# EAGLE board muses72320_D (EAGLE 7.2.0)
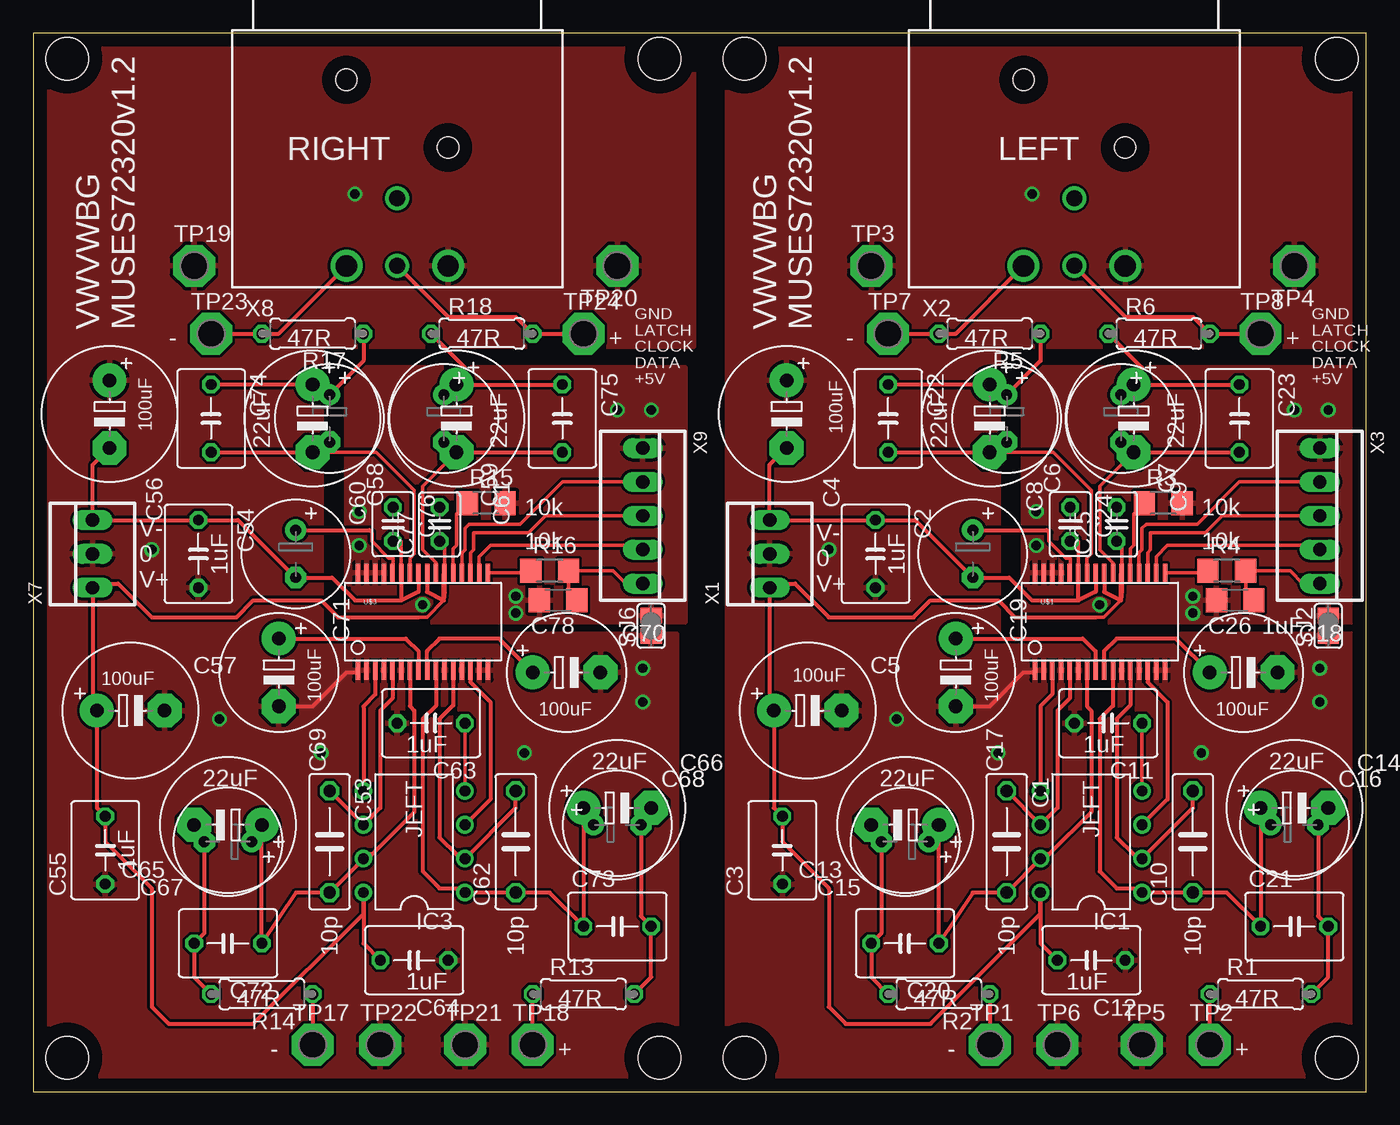
[diagram p0: board, top side]
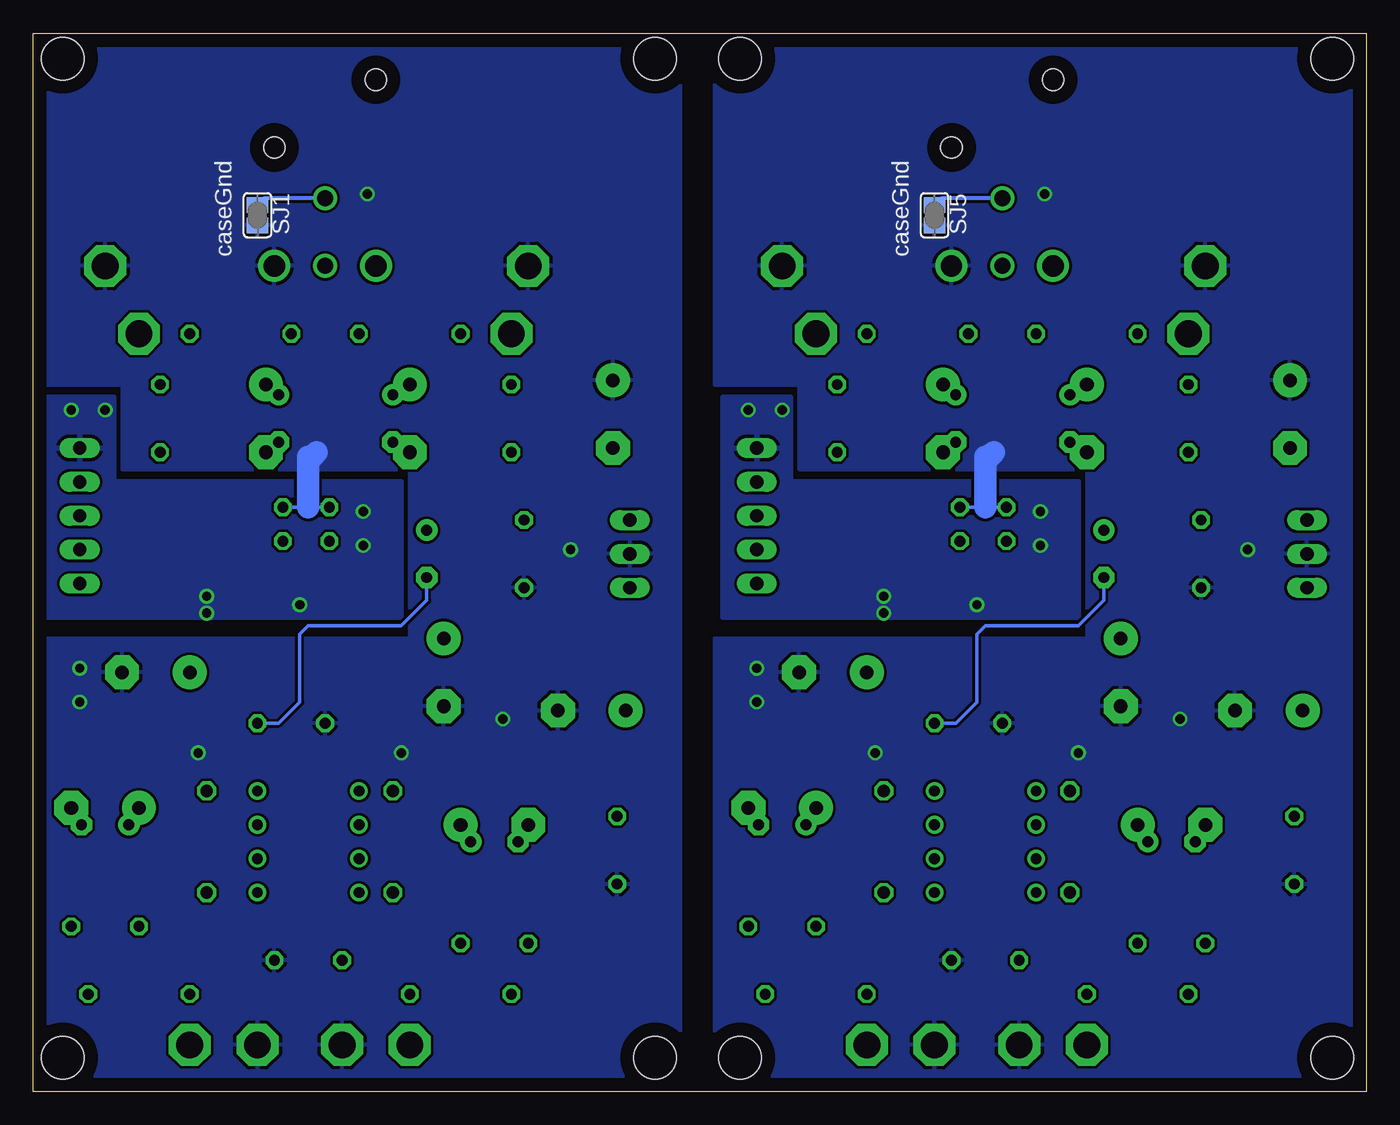
[diagram p1: board, bottom side, seen from below]

Size 100 x 79.36 mm. Coordinates in mm from the lower left corner, seen from the top.
Outline: 0,0 100,0 100,79.36 0,79.36 0,0
Copper layers (1*16): Top 0.035mm / dielectric 1.5mm / Bottom 0.035mm
Design rules "default": minimum track width 10mil, minimum drill 24mil, track to track 8mil, track to pad 8mil, pad to pad 8mil, via to via 8mil, smd to smd 8mil, copper to edge 40mil, drill to drill 8mil, minimum pad ring 10mil, minimum via ring 8mil, stop-mask expansion 4mil, vias tented up to drill 0mil, thermal gap 10mil
Holes 3.2 mm at 2.54,2.54 46.99,2.54 46.99,77.47 2.54,77.47 53.34,2.54 97.79,2.54 97.79,77.47 53.34,77.47

## Footprints (pad centres in the part's own frame; a part is rotated, then mirrored left to right if it is on the bottom)
C075-032X103 = drill 0.914 octagon: 1 -3.81,0; 2 3.81,0
C050-050X075 = drill 0.813 octagon: 1 -2.54,0; 2 2.54,0
E5-10,5 = drill 1.016 pad 2.54: + -2.54,0 | drill 1.016 pad 2.54 octagon: - 2.54,0
E3,5-8 = drill 0.813 pad 1.6: + -1.778,0 | drill 0.813 pad 1.6 octagon: - 1.778,0
E5-8,5 = drill 1.016 pad 2.54: + -2.54,0 | drill 1.016 pad 2.54 octagon: - 2.54,0
C025-030X050 = drill 0.813 octagon: 1 -1.27,0; 2 1.27,0
C1206 = smd 1.6 x 1.8: 1 -1.4,0; 2 1.4,0
DIL08 = drill 0.813 pad 1.27: 1 -3.81,-3.81; 2 -1.27,-3.81; 3 1.27,-3.81; 4 3.81,-3.81; 5 3.81,3.81; 6 1.27,3.81; 7 -1.27,3.81; 8 -3.81,3.81
0207/7 = drill 0.813 octagon: 1 -3.81,0; 2 3.81,0
R1206 = smd 1.6 x 1.803: 1 -1.422,0; 2 1.422,0
SJ = smd 1.168 x 1.6: 1 -0.762,0; 2 0.762,0
P1-20 = drill 2.007 pad 3.15 octagon: TP 0,0
SSOP28DB = smd 0.348 x 1.397: 1 -4.225,-3.656; 2 -3.575,-3.656; 3 -2.925,-3.656; 4 -2.275,-3.656; 5 -1.625,-3.656; 6 -0.975,-3.656; 7 -0.325,-3.656; 8 0.325,-3.656; 9 0.975,-3.656; 10 1.625,-3.656; 11 2.275,-3.656; 12 2.925,-3.656; 13 3.575,-3.656; 14 4.225,-3.656; 15 4.875,-3.656; 16 5.525,-3.656; 17 5.525,3.656; 18 4.875,3.656; 19 4.225,3.656; 20 3.575,3.656; 21 2.925,3.656; 22 2.275,3.656; 23 1.625,3.656; 24 0.975,3.656; 25 0.325,3.656; 26 -0.325,3.656; 27 -0.975,3.656; 28 -1.625,3.656; 29 -2.275,3.656; 30 -2.925,3.656; 31 -3.575,3.656; 32 -4.225,3.656
22-23-2031 = drill 1 long: 1 -2.54,0; 2 0,0; 3 2.54,0
NC3MBH-B = drill 1.6: 1 3.81,0; 2 -3.81,0 | drill 1.2: 3 0,0; G 0,5.08 | hole 1.6: -3.81,13.97; 3.81,8.89
22-23-2051 = drill 1 long: 1 -5.08,0; 2 -2.54,0; 3 0,0; 4 2.54,0; 5 5.08,0

## Placement (x,y rotation side)
C1  [C075-032X103]  73.03,18.73 270 top
C2  [C050-050X075]  63.18,40.32 270 top
C3  [C050-050X075]  56.2,18.1 90 top
C4  [E5-10,5]  56.52,50.8 270 top
C5  [E5-10,5]  58.1,28.57 0 top
C6  [E3,5-8]  73.03,50.48 270 top
C7  [E3,5-8]  81.6,50.48 270 top
C8  [E5-10,5]  71.75,50.48 270 top
C9  [E5-10,5]  82.55,50.48 270 top
C10  [C075-032X103]  87,18.73 90 top
C11  [C050-050X075]  80.64,27.62 180 top
C12  [C050-050X075]  79.38,9.84 180 top
C13  [E5-10,5]  65.41,20 180 top
C14  [E5-10,5]  94.61,21.27 0 top
C15  [E3,5-8]  65.41,18.73 180 top
C16  [E3,5-8]  94.61,20 0 top
C17  [E5-8,5]  69.22,31.43 270 top
C18  [E5-8,5]  90.81,31.43 0 top
C19  [E3,5-8]  70.48,40.32 270 top
C20  [C050-050X075]  65.41,11.11 180 top
C21  [C050-050X075]  94.61,12.38 0 top
C22  [C050-050X075]  64.14,50.48 270 top
C23  [C050-050X075]  90.49,50.48 270 top
C24  [C025-030X050]  77.79,42.55 270 top
C25  [C025-030X050]  81.28,42.55 90 top
C26  [C1206]  90.17,36.83 180 top
C53  [C075-032X103]  22.23,18.73 270 top
C54  [C050-050X075]  12.38,40.32 270 top
C55  [C050-050X075]  5.4,18.1 90 top
C56  [E5-10,5]  5.71,50.8 270 top
C57  [E5-10,5]  7.3,28.57 0 top
C58  [E3,5-8]  22.23,50.48 270 top
C59  [E3,5-8]  30.8,50.48 270 top
C60  [E5-10,5]  20.95,50.48 270 top
C61  [E5-10,5]  31.75,50.48 270 top
C62  [C075-032X103]  36.2,18.73 90 top
C63  [C050-050X075]  29.84,27.62 180 top
C64  [C050-050X075]  28.57,9.84 180 top
C65  [E5-10,5]  14.61,20 180 top
C66  [E5-10,5]  43.81,21.27 0 top
C67  [E3,5-8]  14.61,18.73 180 top
C68  [E3,5-8]  43.81,20 0 top
C69  [E5-8,5]  18.41,31.43 270 top
C70  [E5-8,5]  40.01,31.43 0 top
C71  [E3,5-8]  19.68,40.32 270 top
C72  [C050-050X075]  14.61,11.11 180 top
C73  [C050-050X075]  43.81,12.38 0 top
C74  [C050-050X075]  13.34,50.48 270 top
C75  [C050-050X075]  39.69,50.48 270 top
C76  [C025-030X050]  26.99,42.55 270 top
C77  [C025-030X050]  30.48,42.55 90 top
C78  [C1206]  39.37,36.83 180 top
IC1  OP  [DIL08]  79.38,18.73 90 top
IC3  OP  [DIL08]  28.57,18.73 90 top
R1  [0207/7]  92.08,7.3 0 top
R2  [0207/7]  67.94,7.3 180 top
R3  [R1206]  84.77,44.13 0 top
R4  [R1206]  89.53,39.05 0 top
R5  [0207/7]  71.75,56.83 180 top
R6  [0207/7]  84.45,56.83 0 top
R13  [0207/7]  41.27,7.3 0 top
R14  [0207/7]  17.14,7.3 180 top
R15  [R1206]  33.97,44.13 0 top
R16  [R1206]  38.73,39.05 0 top
R17  [0207/7]  20.95,56.83 180 top
R18  [0207/7]  33.66,56.83 0 top
SJ1  [SJ]  83.19,65.72 270 bottom
SJ2  [SJ]  97.16,34.92 90 top
SJ5  [SJ]  32.38,65.72 270 bottom
SJ6  [SJ]  46.35,34.92 90 top
TP1  PTR1PAD1-20  [P1-20]  71.75,3.49 0 top
TP2  PTR1PAD1-20  [P1-20]  88.27,3.49 0 top
TP3  PTR1PAD1-20  [P1-20]  62.87,61.91 0 top
TP4  PTR1PAD1-20  [P1-20]  94.61,61.91 180 top
TP5  PTR1PAD1-20  [P1-20]  83.19,3.49 0 top
TP6  PTR1PAD1-20  [P1-20]  76.83,3.49 0 top
TP7  PTR1PAD1-20  [P1-20]  64.14,56.83 0 top
TP8  PTR1PAD1-20  [P1-20]  92.08,56.83 0 top
TP17  PTR1PAD1-20  [P1-20]  20.95,3.49 0 top
TP18  PTR1PAD1-20  [P1-20]  37.47,3.49 0 top
TP19  PTR1PAD1-20  [P1-20]  12.06,61.91 0 top
TP20  PTR1PAD1-20  [P1-20]  43.81,61.91 180 top
TP21  PTR1PAD1-20  [P1-20]  32.38,3.49 0 top
TP22  PTR1PAD1-20  [P1-20]  26.04,3.49 0 top
TP23  PTR1PAD1-20  [P1-20]  13.34,56.83 0 top
TP24  PTR1PAD1-20  [P1-20]  41.27,56.83 0 top
U$1  MUSES72320  [SSOP28DB]  79.38,35.24 0 top
U$3  MUSES72320  [SSOP28DB]  28.57,35.24 0 top
X1  22-23-2031  [22-23-2031]  55.24,40.32 90 top
X2  NC3MBH-B  [NC3MBH-B]  78.11,61.91 0 top
X3  22-23-2051  [22-23-2051]  96.52,43.18 270 top
X7  22-23-2031  [22-23-2031]  4.45,40.32 90 top
X8  NC3MBH-B  [NC3MBH-B]  27.3,61.91 0 top
X9  22-23-2051  [22-23-2051]  45.72,43.18 270 top

## Library data of the parts
C1-C26 C53-C78 R1-R6 R13-R18 U$1 U$3 = Vwvwbg
IC1 IC3 = linear
SJ1 SJ2 SJ5 SJ6 = jumper
TP1-TP8 TP17-TP24 = testpad
X1 X7 = con-molex; MF: MOLEX; MPN: 22-23-2031; OC_FARNELL: 1462950; OC_NEWARK: 30C0862
X2 X8 = con-neutrik_ag; MPN: NC3MBH-B; OC_FARNELL: unknown; OC_NEWARK: 27B4288
X3 X9 = con-molex; MF: MOLEX; MPN: 22-23-2051; OC_FARNELL: 1462952; OC_NEWARK: 38C9178

## Nets
CLOCK1: U$1.19 X3.3
CLOCK2: U$3.19 X9.3
DATA1: U$1.18 X3.4
DATA2: U$3.18 X9.4
GND1: C26.2 R3.2 SJ2.2 U$1.29 U$1.30 U$1.31 U$1.32 X3.1
GND2: C2.2 C3.1 C4.+ C5.- C11.2 C12.1 C17.- C18.- C24.1 C25.2 SJ1.2 SJ2.1 TP3.TP TP4.TP TP5.TP TP6.TP U$1.1 U$1.2 U$1.4 U$1.6 U$1.11 U$1.13 U$1.15 U$1.16 X1.2 X2.1
GND4: C78.2 R15.2 SJ6.2 U$3.29 U$3.30 U$3.31 U$3.32 X9.1
GND5: C54.2 C55.1 C56.+ C57.- C63.2 C64.1 C69.- C70.- C76.1 C77.2 SJ5.2 SJ6.1 TP19.TP TP20.TP TP21.TP TP22.TP U$3.1 U$3.2 U$3.4 U$3.6 U$3.11 U$3.13 U$3.15 U$3.16 X7.2 X8.1
LATCH1: U$1.20 X3.2
LATCH2: U$3.20 X9.2
N$1: IC1.3 U$1.14
N$2: C10.2 IC1.2 U$1.12
N$3: C1.1 IC1.6 U$1.5
N$4: IC1.5 U$1.3
N$5: C1.2 C13.+ C15.+ C20.1 IC1.7 U$1.7
N$6: C10.1 C14.+ C16.+ C21.1 IC1.1 U$1.10
N$7: C13.- C15.- C20.2 R2.2
N$8: C14.- C16.- C21.2 R1.2
N$9: C17.+ U$1.8
N$10: C18.+ U$1.9
N$11: R3.1 U$1.21
N$12: R4.1 U$1.17
N$13: C19.+ U$1.28
N$14: C7.- C9.- C23.2 U$1.23
N$15: C6.- C8.- C22.2 U$1.26
N$16: C6.+ C8.+ C22.1 R5.1
N$17: C7.+ C9.+ C23.1 R6.1
N$18: C26.1 R4.2 X3.5
N$19: R2.1 TP1.TP
N$20: R1.1 TP2.TP
N$21: SJ1.1 X2.G
N$22: R5.2 TP7.TP X2.2
N$23: R6.2 TP8.TP X2.3
N$47: IC3.3 U$3.14
N$48: C62.2 IC3.2 U$3.12
N$49: C53.1 IC3.6 U$3.5
N$50: IC3.5 U$3.3
N$51: C53.2 C65.+ C67.+ C72.1 IC3.7 U$3.7
N$52: C62.1 C66.+ C68.+ C73.1 IC3.1 U$3.10
N$53: C65.- C67.- C72.2 R14.2
N$54: C66.- C68.- C73.2 R13.2
N$55: C69.+ U$3.8
N$56: C70.+ U$3.9
N$57: R15.1 U$3.21
N$58: R16.1 U$3.17
N$59: C71.+ U$3.28
N$60: C59.- C61.- C75.2 U$3.23
N$61: C58.- C60.- C74.2 U$3.26
N$62: C58.+ C60.+ C74.1 R17.1
N$63: C59.+ C61.+ C75.1 R18.1
N$64: C78.1 R16.2 X9.5
N$65: R14.1 TP17.TP
N$66: R13.1 TP18.TP
N$67: SJ5.1 X8.G
N$68: R17.2 TP23.TP X8.2
N$69: R18.2 TP24.TP X8.3
V+1: C3.2 C5.+ C12.2 C25.1 IC1.8 U$1.22 U$1.24 X1.1
V+2: C55.2 C57.+ C64.2 C77.1 IC3.8 U$3.22 U$3.24 X7.1
V-1: C2.1 C4.- C11.1 C19.- C24.2 IC1.4 U$1.25 U$1.27 X1.3
V-2: C54.1 C56.- C63.1 C71.- C76.2 IC3.4 U$3.25 U$3.27 X7.3

## Tracks (layer width: path | path; a pad name or v marks a point on that pad's centre or on a via)
CLOCK1
  Top 0.254: X3.3 89.22,43.18 87.95,41.91 83.82,41.91 83.82,40.64 83.6,40.42 U$1.19
CLOCK2
  Top 0.254: X9.3 38.42,43.18 37.15,41.91 33.02,41.91 33.02,40.64 32.8,40.42 U$3.19
DATA1
  Top 0.254: U$1.18 84.25,40.12 85.09,40.96 96.2,40.96 X3.4
DATA2
  Top 0.254: U$3.18 33.45,40.12 34.29,40.96 45.4,40.96 X9.4
GND1  (via drill 0.7)
  other vias: 75.25,40.96 87,37.15 94.61,51.12 97.16,51.12 87,35.88 75.25,43.5 80.01,36.51
  pour Top: 74.3,54.29 99.69,54.29 99.69,35.24 74.3,35.24
  pour Bottom: 72.39,45.72 93.98,45.72 93.98,52.07 100.33,52.07 100.33,35.56 72.39,35.56
GND2  (via drill 0.7)
  Top 0.305: C17.- 71.75,28.89 74.3,31.43 75,31.43 U$1.1
  Bottom 0.254: C24.1 79.38,43.81 C25.2
  Bottom 1.676: 79.38,43.81 79.38,47.62 79.06,47.62 78.74,47.94
  other vias: 96.52,31.75 96.52,29.21 87.63,25.4 72.39,25.4 64.77,27.94 59.69,40.64 74.93,67.31
  pour Bottom: 51.44,79.69 100.97,79.69 100.97,53.02 93.34,53.02 93.34,46.67 71.75,46.67 71.75,33.97 99.69,33.97 99.69,-0.32 51.44,-0.32
  pour Top: 52.07,80.01 100.33,80.01 100.33,55.88 72.39,55.88 72.39,34.29 100.33,34.29 100.33,0 52.07,0
GND4  (via drill 0.7)
  other vias: 24.45,40.96 36.2,37.15 43.81,51.12 46.35,51.12 36.2,35.88 24.45,43.5 29.21,36.51
  pour Top: 23.5,54.29 48.9,54.29 48.9,35.24 23.5,35.24
  pour Bottom: 21.59,45.72 43.18,45.72 43.18,52.07 48.26,52.07 48.26,35.56 21.59,35.56
GND5  (via drill 0.7)
  Top 0.305: C69.- 20.95,28.89 23.5,31.43 24.2,31.43 U$3.1
  Bottom 0.254: C76.1 28.57,43.81 C77.2
  Bottom 1.676: 28.57,43.81 28.57,47.62 28.26,47.62 27.94,47.94
  other vias: 45.72,31.75 45.72,29.21 36.83,25.4 21.59,25.4 13.97,27.94 8.89,40.64 24.13,67.31
  pour Bottom: -0.64,79.69 48.9,79.69 48.9,53.02 42.55,53.02 42.55,46.67 20.95,46.67 20.95,33.97 48.9,33.97 48.9,-0.32 -0.64,-0.32
  pour Top: 0,80.01 49.53,80.01 49.53,55.88 21.59,55.88 21.59,34.29 48.26,34.29 48.26,0 0,0
LATCH1
  Top 0.254: X3.2 90.49,45.72 87.31,42.55 83.5,42.55 83.19,42.23 83.19,40.64 82.95,40.41 U$1.20
LATCH2
  Top 0.254: X9.2 39.69,45.72 36.51,42.55 32.7,42.55 32.38,42.23 32.38,40.64 32.15,40.41 U$3.20
N$1
  Top 0.305: U$1.14 83.6,30.7 85.09,29.21 85.09,21.91 IC1.3
N$2
  Top 0.305: C10.2 87,21.27 IC1.2 82.87,17.78 82.55,17.78 81.28,19.05 81.28,27.94 82.3,28.96 U$1.12
N$3
  Top 0.305: C1.1 IC1.6 76.83,21.27 76.83,28.57 77.75,29.49 U$1.5
N$4
  Top 0.305: U$1.3 76.45,29.78 75.56,28.89 IC1.5
N$5
  Top 0.305: C15.+ 67.94,20.77 C13.+ C20.1 70.48,14.92 C1.2 IC1.7 75.88,17.78 76.2,17.78 79.38,20.95 79.38,28.57 79.05,28.9 U$1.7
N$6
  Top 0.305: C16.+ 92.08,20.77 C14.+ C21.1 89.53,14.92 C10.1 IC1.1 82.87,15.24 81.28,15.24 80.01,16.51 80.01,27.94 81,28.93 U$1.10
N$7
  Top 0.305: C13.- 62.87,20.77 C15.- 63.63,11.87 C20.2 62.87,8.57 R2.2
N$8
  Top 0.305: R1.2 97.16,8.57 C21.2 96.39,13.14 C16.- 97.16,20.77 C14.-
N$9
  Top 0.305: C17.+ 78.74,33.97 79.69,33.02 U$1.8
N$10
  Top 0.305: U$1.9 80.35,33.04 81.28,33.97 85.72,33.97 C18.+
N$11
  Top 0.254: U$1.21 82.3,40.71 82.55,40.96 82.55,43.33 R3.1
N$12
  Top 0.254: U$1.17 87.96,38.9 R4.1
N$13
  Top 0.254: 77.79,38.94 77.79,40.01 77.47,40.01 76.2,41.27 76.2,41.91 76.01,42.1
  Top 0.305: C19.+ 76.01,42.1 | 77.79,38.94 U$1.28
N$14
  Top 0.254: U$1.23 81,39.65 80.01,40.64 80.01,45.4 C9.-
  Top 0.305: C23.2 C9.- 82.68,47.94 C7.-
N$15
  Top 0.254: U$1.26 79.05,40 79.38,40.32 79.38,45.09 76.52,47.94 73.03,47.94 72.64,48.32
  Top 0.305: C22.2 C8.- 72.26,47.94 72.64,48.32 C6.-
N$16
  Top 0.305: R5.1 75.56,54.8 C6.+ 72.52,52.26 C8.+ C22.1
N$17
  Top 0.305: C7.+ 82.42,52.26 C9.+ | C9.+ C23.1 | C9.+ 83.19,54.29 R6.1
N$18
  Top 0.254: X3.5 95.25,38.1 94.3,39.05 R4.2 90.96,37.44 C26.1
N$19
  Top 0.305: R2.1 TP1.TP
N$20
  Top 0.305: TP2.TP R1.1
N$21
  Bottom 0.305: X2.G 82.68,66.99 SJ1.1
N$22
  Top 0.305: TP7.TP R5.2 69.22,56.83 X2.2
N$23
  Top 0.305: X2.3 81.92,58.1 87,58.1 R6.2 TP8.TP
N$47
  Top 0.305: U$3.14 32.8,30.7 34.29,29.21 34.29,21.91 IC3.3
N$48
  Top 0.305: C62.2 36.2,21.27 IC3.2 32.07,17.78 31.75,17.78 30.48,19.05 30.48,27.94 31.5,28.96 U$3.12
N$49
  Top 0.305: C53.1 IC3.6 26.04,21.27 26.04,28.57 26.95,29.49 U$3.5
N$50
  Top 0.305: U$3.3 25.65,29.78 24.77,28.89 IC3.5
N$51
  Top 0.305: C67.+ 17.14,20.77 C65.+ C72.1 19.68,14.92 C53.2 IC3.7 25.08,17.78 25.4,17.78 28.57,20.95 28.57,28.57 28.25,28.9 U$3.7
N$52
  Top 0.305: C68.+ 41.27,20.77 C66.+ C73.1 38.73,14.92 C62.1 IC3.1 32.07,15.24 30.48,15.24 29.21,16.51 29.21,27.94 30.2,28.93 U$3.10
N$53
  Top 0.305: C65.- 12.06,20.77 C67.- 12.83,11.87 C72.2 12.06,8.57 R14.2
N$54
  Top 0.305: R13.2 46.35,8.57 C73.2 45.59,13.14 C68.- 46.35,20.77 C66.-
N$55
  Top 0.305: C69.+ 27.94,33.97 28.89,33.02 U$3.8
N$56
  Top 0.305: U$3.9 29.55,33.04 30.48,33.97 34.92,33.97 C70.+
N$57
  Top 0.254: U$3.21 31.5,40.71 31.75,40.96 31.75,43.33 R15.1
N$58
  Top 0.254: U$3.17 37.16,38.9 R16.1
N$59
  Top 0.254: 26.99,38.94 26.99,40.01 26.67,40.01 25.4,41.27 25.4,41.91 25.21,42.1
  Top 0.305: C71.+ 25.21,42.1 | 26.99,38.94 U$3.28
N$60
  Top 0.254: U$3.23 30.2,39.65 29.21,40.64 29.21,45.4 C61.-
  Top 0.305: C75.2 C61.- 31.88,47.94 C59.-
N$61
  Top 0.254: U$3.26 28.25,40 28.57,40.32 28.57,45.09 25.72,47.94 22.23,47.94 21.84,48.32
  Top 0.305: C74.2 C60.- 21.46,47.94 21.84,48.32 C58.-
N$62
  Top 0.305: R17.1 24.77,54.8 C58.+ 21.72,52.26 C60.+ C74.1
N$63
  Top 0.305: C59.+ 31.62,52.26 C61.+ | C61.+ C75.1 | C61.+ 32.38,54.29 R18.1
N$64
  Top 0.254: X9.5 44.45,38.1 43.5,39.05 R16.2 40.16,37.44 C78.1
N$65
  Top 0.305: R14.1 TP17.TP
N$66
  Top 0.305: TP18.TP R13.1
N$67
  Bottom 0.305: X8.G 31.88,66.99 SJ5.1
N$68
  Top 0.305: TP23.TP R17.2 18.41,56.83 X8.2
N$69
  Top 0.305: X8.3 31.11,58.1 36.2,58.1 R18.2 TP24.TP
V+1
  Top 0.254: U$1.22 81.65,40.91 C25.1 | 79.69,35.56 80.33,35.56 81.6,36.83 | X1.1 55.56,37.78 55.88,38.1
  Top 0.305: U$1.24 80.35,37.49 80.33,37.47 81.6,36.83 | 81.6,36.83 81.6,38.85 U$1.22 81.65,37.52 81.6,36.83 | X1.1 55.24,28.89 C5.+ 55.56,21.27 C3.2 56.2,18.73 59.69,15.24 59.69,6.35 60.96,5.08 67.31,5.08 75.56,13.34 IC1.8 75.56,11.11 C12.2 | 55.88,38.1 57.15,38.1 59.69,35.56 66.04,35.56 67.31,36.83 72.39,36.83 73.66,35.56 79.69,35.56
V+2
  Top 0.254: U$3.22 30.85,40.91 C77.1 | 28.89,35.56 29.53,35.56 30.8,36.83 | X7.1 4.76,37.78 5.08,38.1
  Top 0.305: U$3.24 29.55,37.49 29.53,37.47 30.8,36.83 | 30.8,36.83 30.8,38.85 U$3.22 30.85,37.52 30.8,36.83 | X7.1 4.45,28.89 C57.+ 4.76,21.27 C55.2 5.4,18.73 8.89,15.24 8.89,6.35 10.16,5.08 16.51,5.08 24.77,13.34 IC3.8 24.77,11.11 C64.2 | 5.08,38.1 6.35,38.1 8.89,35.56 15.24,35.56 16.51,36.83 21.59,36.83 22.86,35.56 28.89,35.56
V-1
  Top 0.254: IC1.4 C11.1 | U$1.27 78.4,41.25 77.81,41.25 C24.2
  Top 0.305: C4.- 55.24,46.99 X1.3 C2.1 66.17,42.86 C19.- 73.22,38.54 74.93,36.83 78.42,36.83 | 78.42,36.83 78.42,38.88 U$1.27 | U$1.25 79.7,37.47 79.69,37.47 78.42,36.83
  Bottom 0.254: C11.1 81.6,27.62 80.01,29.21 80.01,34.29 79.38,34.92 72.39,34.92 70.48,36.83 C19.-
V-2
  Top 0.254: IC3.4 C63.1 | U$3.27 27.6,41.25 27.01,41.25 C76.2
  Top 0.305: C56.- 4.45,46.99 X7.3 C54.1 15.37,42.86 C71.- 22.42,38.54 24.13,36.83 27.62,36.83 | 27.62,36.83 27.62,38.88 U$3.27 | U$3.25 28.9,37.47 28.89,37.47 27.62,36.83
  Bottom 0.254: C63.1 30.8,27.62 29.21,29.21 29.21,34.29 28.57,34.92 21.59,34.92 19.68,36.83 C71.-

## Text on the board
tPlace: RIGHT | LEFT | VWVWBG / MUSES72320v1.2 | VWVWBG / MUSES72320v1.2 | - | 47R | 47R | + | - | 47R | 47R | + | GND / LATCH / CLOCK / DATA / +5V | 100uF | GND / LATCH / CLOCK / DATA / +5V | 100uF | 22uF | 22uF | 22uF | 22uF | 10k | 10k | 10k | 10k | 1uF | 1uF | V- / 0 / V+ | V- / 0 / V+ | 1uF | 100uF | 100uF | 100uF | 100uF | 100uF | 100uF | 1uF | 1uF | 22uF | 22uF | 22uF | 22uF | JEFT | JEFT | 1uF | 10p | 10p | 10p | 10p | 1uF | 1uF | 47R | 47R | 47R | 47R | - | + | - | +
bPlace: caseGnd | caseGnd